# Altium PCB wificar.PcbDoc (part 3 of 3)
Units mil, origin at the board's own origin, x right, y up, seen from the top; angles counter-clockwise.
Board outline 3940.12 x 3943.17 mil, 2 copper layers (Top Layer, Bottom Layer); 89 components, 114 nets, 455 pads, 176 vias.
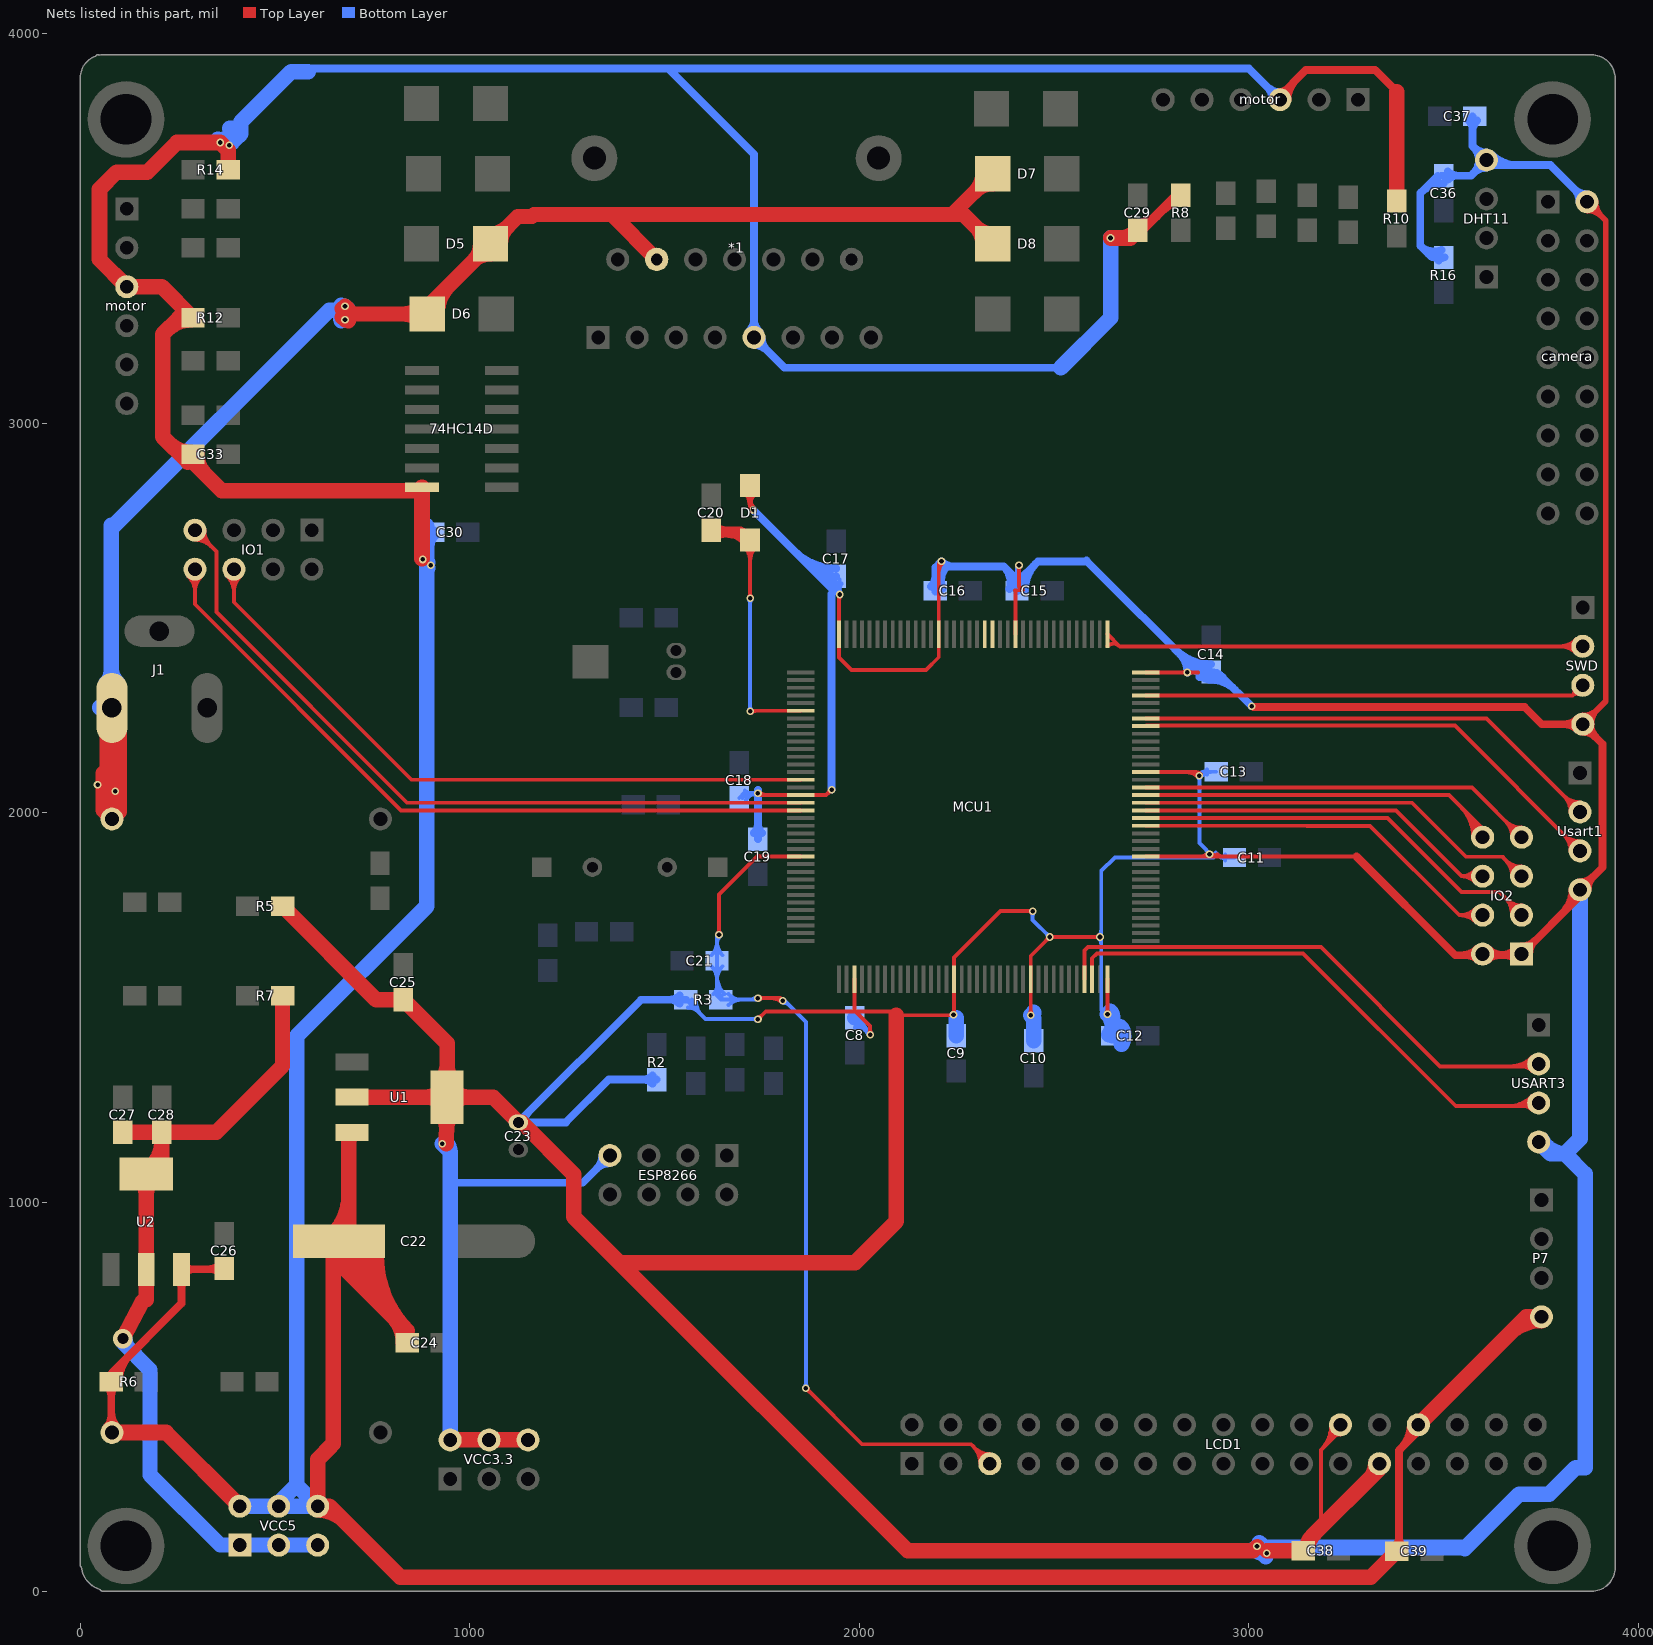
[diagram p3: the nets of this part, all layers, seen from the top]

## Via types
v1: diameter 19.68, hole 11.81, Top Layer to Bottom Layer, 175 vias
v2: diameter 50, hole 28, Top Layer to Bottom Layer, 1 vias

## Nets (pads, with @x,y where several pads share a name; then routed paths per layer and width w, separated by ;. In a path a pad name is that pad's centre, name@x,y a point inside that pad or via, vN(x,y) a via of type N, cw(c..) or ccw(c..) an arc to the next point about the centre after c; other vN are vias at no path point) (continued)
PF5: IO1.6 MCU1.15 | length 1876.5
  Top Layer w10: IO1.6@377.66,2607.66 cw(c335.79,2565.79) 395,2565.79 cw(c454.21,2565.79) IO1.6@412.34,2607.66 ; IO1.6@384.73,2614.73 cw(c359.93,2589.93) 395,2589.93 cw(c430.07,2589.93) IO1.6@405.27,2614.73 ; IO1.6@395,2625 395,2540 850.57,2084.43 MCU1.15@1849.65,2084.43
PF6: IO1.7 MCU1.18 | length 2083.3
  Top Layer w10: IO1.7@295,2700.47 cw(c295,2641.26) 336.87,2683.13 cw(c378.74,2725) IO1.7@319.53,2725 ; IO1.7@295,2710.47 cw(c295,2675.4) 319.8,2700.2 cw(c344.6,2725) IO1.7@309.53,2725 ; IO1.7@295,2725 350,2670 350,2515 839.62,2025.38 MCU1.18@1849.65,2025.38
PF7: IO1.8 MCU1.19 | length 2012
  Top Layer w10: IO1.8@277.66,2607.66 cw(c235.79,2565.79) 295,2565.79 cw(c354.21,2565.79) IO1.8@312.34,2607.66 ; IO1.8@284.73,2614.73 cw(c259.93,2589.93) 295,2589.93 cw(c330.07,2589.93) IO1.8@305.27,2614.73 ; IO1.8@295,2625 295,2535 824.31,2005.69 MCU1.19@1849.65,2005.69
PG3: IO2.4 MCU1.88 | length 1107.6
  Top Layer w10: MCU1.88@2735.47,1966.32 3148.32,1966.32 3148.65,1966 3311,1966 3540,1737 IO2.4@3600,1737 ; IO2.4@3582.66,1719.66 ccw(c3540.79,1677.79) 3540.79,1737 ccw(c3540.79,1796.21) IO2.4@3582.66,1754.34 ; IO2.4@3589.73,1726.73 ccw(c3564.93,1701.93) 3564.93,1737 ccw(c3564.93,1772.07) IO2.4@3589.73,1747.27
PG4: IO2.3 MCU1.89 | length 1217.5
  Top Layer w10: MCU1.89@2735.47,1986.01 3355.99,1986.01 3545.53,1796.47 3643.53,1796.47 3700,1740 IO2.3@3700,1737 ; 3656.01,1783.99 cw(c3609.02,1737) IO2.3@3675.47,1737 ; 3663.25,1776.75 ccw(c3700,1813.5) IO2.3@3700,1761.53 ; 3673.08,1766.92 cw(c3643.16,1737) IO2.3@3685.47,1737 ; 3680.32,1759.68 ccw(c3700,1779.36) IO2.3@3700,1751.53
PG5: IO2.6 MCU1.90 | length 1062.5
  Top Layer w10: MCU1.90@2735.47,2005.69 3377.31,2005.69 3546,1837 ; IO2.6@3581.53,1820.86 ccw(c3546,1789.82) 3546,1837 ; IO2.6@3581.53,1853.14 cw(c3546,1884.18) 3546,1837 ; IO2.6@3589.06,1827.44 ccw(c3568.02,1809.06) 3568.02,1837 ccw(c3568.02,1864.94) IO2.6@3589.06,1846.56 ; IO2.6@3600,1837 3546,1837
PG6: IO2.5 MCU1.91 | length 1191.8
  Top Layer w10: MCU1.91@2735.47,2025.38 3418.62,2025.38 3557,1887 3652,1887 3652,1885 IO2.5@3700,1837 ; IO2.5@3675.47,1837 ccw(c3616.26,1837) 3658.13,1878.87 ccw(c3700,1920.74) IO2.5@3700,1861.53 ; IO2.5@3685.47,1837 ccw(c3650.4,1837) 3675.2,1861.8 ccw(c3700,1886.6) IO2.5@3700,1851.53
PG7: IO2.8 MCU1.92 | length 1130
  Top Layer w10: MCU1.92@2735.47,2045.06 3513.94,2045.06 3600,1959 IO2.8@3600,1937 ; 3542.57,2016.43 cw(c3463.15,1937) IO2.8@3575.47,1937 ; 3559.64,1999.36 cw(c3497.29,1937) IO2.8@3585.47,1937 ; 3576.71,1982.29 cw(c3531.43,1937) IO2.8@3595.47,1937
PG8: IO2.7 MCU1.93 | length 1165.6
  Top Layer w10: MCU1.93@2735.47,2064.75 3572.25,2064.75 IO2.7@3700,1937 ; IO2.7@3675.47,1937 ccw(c3616.26,1937) 3658.13,1978.87 ccw(c3700,2020.74) IO2.7@3700,1961.53 ; IO2.7@3685.47,1937 ccw(c3650.4,1937) 3675.2,1961.8 ccw(c3700,1986.6) IO2.7@3700,1951.53
PG9: MCU1.124
PG10: MCU1.125
RESET: C21.2 LCD1.5 MCU1.25 R3.1 | length 2924.7
  Top Layer w10: v1@1636.58,1690.42 ccw(c1628.31,1698.69) 1640,1698.69 ccw(c1651.69,1698.69) v1@1643.42,1690.42 ; v1(1640,1687) 1640,1790 1740,1890 1742.42,1887.58 MCU1.25@1849.65,1887.58 ; v1(1740,1524) 1797,1524 ; v1@1743.42,1520.58 cw(c1751.69,1512.31) 1751.69,1524 cw(c1751.69,1535.69) v1@1743.42,1527.42 ; 1775.41,1524 cw(c1775.41,1488.41) v1@1800.58,1513.58 ; v1@1799.2,1517.6 ccw(c1791.56,1518.56) 1797,1524 ; v1@1803.4,1521.8 cw(c1802.44,1529.44) 1797,1524 ; v1(1804,1517) 1797,1524 ; v1@1863,518.16 cw(c1863,506.47) 1871.27,514.73 cw(c1879.53,523) v1@1867.84,523 ; v1(1863,523) 2007,379 2287,379 2335,331 LCD1.5@2335,329 ; 2291.71,374.29 cw(c2246.43,329) LCD1.5@2310.47,329 ; 2296.54,369.46 ccw(c2335,407.91) LCD1.5@2335,353.53 ; 2308.79,357.21 cw(c2280.57,329) LCD1.5@2320.47,329 ; 2313.61,352.39 ccw(c2335,373.77) LCD1.5@2335,343.53
  Bottom Layer w10: C21.2@1620.86,1605.79 cw(c1586.72,1571.65) 1635,1571.65 cw(c1683.28,1571.65) C21.2@1649.14,1605.79 ; C21.2@1620.86,1634.08 ccw(c1586.72,1668.22) 1635,1668.22 ccw(c1683.28,1668.22) C21.2@1649.14,1634.08 ; R3.1@1625.86,1534.21 ccw(c1603.79,1556.28) 1635,1556.28 ccw(c1676.21,1556.28) R3.1@1647.07,1527.14 ; 1635,1580.42 ccw(c1700.36,1580.42) R3.1@1654.14,1534.21 ; 1635,1663.24 cw(c1663.76,1663.24) v1@1643.42,1683.58 ; v1(1640,1687) 1635,1682 C21.2@1635,1619.94 1635,1530.06 R3.1@1645,1520.06 1736.06,1520.06 v1(1740,1524) ; R3.1@1664.14,1505.92 cw(c1698.28,1471.78) 1698.28,1520.06 cw(c1698.28,1568.35) R3.1@1664.14,1534.21 ; 1718.81,1520.06 ccw(c1718.81,1545.19) v1@1736.58,1527.42 ; v1@1804,1512.16 cw(c1804,1488.4) 1820.8,1505.2 ; v1@1807,1519 1863,1463 v1(1863,523) ; v1@1859.58,526.42 ccw(c1851.31,534.69) 1863,534.69 ccw(c1874.69,534.69) v1@1866.42,526.42
SWCLK: MCU1.109 SWD.2 | length 1415.7
  Top Layer w10: MCU1.109@2637.05,2428.02 cw(c2652.23,2410.73) 2668.5,2427 ; MCU1.109@2637.05,2458.45 2668.5,2427 ; SWD.2@3839.66,2409.66 ccw(c3797.79,2367.79) 3797.79,2427 ccw(c3797.79,2486.21) SWD.2@3839.66,2444.34 ; SWD.2@3846.73,2416.73 ccw(c3821.93,2391.93) 3821.93,2427 ccw(c3821.93,2462.07) SWD.2@3846.73,2437.27 ; SWD.2@3857,2427 2668.5,2427
SWDIO: MCU1.105 SWD.3 | length 1168.4
  Top Layer w10: MCU1.105@2735.47,2300.97 3830.97,2300.97 ; SWD.3@3834.32,2317.67 cw(c3820.11,2311.83) 3830.97,2300.97 ; SWD.3@3847.67,2304.32 ccw(c3841.83,2290.11) 3830.97,2300.97 ; SWD.3@3857,2327 3830.97,2300.97
USART1_RX: MCU1.102 Usart1.2 | length 1362
  Top Layer w10: MCU1.102@2735.47,2241.91 3610.09,2241.91 Usart1.2@3850,2002 ; Usart1.2@3825.47,2002 ccw(c3766.26,2002) 3808.13,2043.87 ccw(c3850,2085.74) Usart1.2@3850,2026.53 ; Usart1.2@3835.47,2002 ccw(c3800.4,2002) 3825.2,2026.8 ccw(c3850,2051.6) Usart1.2@3850,2016.53
USART1_TX: MCU1.101 Usart1.3 | length 1396.2
  Top Layer w10: MCU1.101@2735.47,2222.23 2736.63,2223.39 3528.61,2223.39 Usart1.3@3850,1902 ; Usart1.3@3825.47,1902 ccw(c3766.26,1902) 3808.13,1943.87 ccw(c3850,1985.74) Usart1.3@3850,1926.53 ; Usart1.3@3835.47,1902 ccw(c3800.4,1902) 3825.2,1926.8 ccw(c3850,1951.6) Usart1.3@3850,1916.53
USART3_RX: MCU1.70 USART3.3 | length 1550.7
  Top Layer w10: MCU1.70@2597.68,1572.62 2597.68,1626.32 2610.4,1639.05 3138.95,1639.05 3531,1247 USART3.3@3755,1247 ; 3665.47,1247 ccw(c3665.47,1333.53) USART3.3@3726.66,1272.34 ; 3689.61,1247 ccw(c3689.61,1309.39) USART3.3@3733.73,1265.27 ; 3704.1,1247 cw(c3704.1,1215.1) USART3.3@3726.66,1237.66 ; 3713.76,1247 ccw(c3713.76,1285.24) USART3.3@3740.8,1258.2
USART3_TX: MCU1.69 USART3.2 | length 1506.5
  Top Layer w10: MCU1.69@2577.99,1572.62 2577.99,1645.99 2587.05,1655.05 3184.95,1655.05 3491,1349 USART3.2@3744,1349 ; 3670.3,1349 ccw(c3670.3,1428.7) USART3.2@3726.66,1372.34 ; 3694.44,1349 ccw(c3694.44,1404.56) USART3.2@3733.73,1365.27 ; 3699.27,1349 cw(c3699.27,1310.27) USART3.2@3726.66,1337.66
VBAT: C20.2 D1.2 MCU1.6 | length 1065.6
  Top Layer w10: D1.2@1705.44,2681.5 cw(c1670.29,2646.35) 1720,2646.35 cw(c1769.71,2646.35) D1.2@1734.56,2681.5 ; v1@1716.58,2553.42 ccw(c1708.31,2561.69) 1720,2561.69 ccw(c1731.69,2561.69) v1@1723.42,2553.42 ; v1(1720,2260) 1721.6,2261.6 MCU1.6@1849.65,2261.6 ; v1(1720,2550) D1.2@1720,2700 ; v1@1723.42,2256.58 cw(c1735.55,2244.45) 1735.55,2261.6
  Top Layer w20: C20.2@1619.94,2725 1695,2725 D1.2@1720,2700 ; C20.2@1627.79,2707.22 cw(c1658.17,2657.78) 1673.19,2713.83 ; C20.2@1630.54,2714.39 cw(c1656.15,2688.79) 1656.15,2725 cw(c1656.15,2761.21) C20.2@1630.54,2735.61 ; C20.2@1631.51,2725 cw(c1631.51,2615.45) D1.2@1708.98,2692.91 ; 1679.79,2725 cw(c1679.79,2663.73) D1.2@1723.12,2707.05
  Bottom Layer w10: v1@1716.58,2263.42 ccw(c1708.31,2271.69) 1720,2271.69 ccw(c1731.69,2271.69) v1@1723.42,2263.42 ; v1@1716.58,2546.58 cw(c1708.31,2538.31) 1720,2538.31 cw(c1731.69,2538.31) v1@1723.42,2546.58 ; v1(1720,2260) v1(1720,2550)
VCC1.8: C27.1 C28.1 R7.1 U2.2 U2.4 VCC5.1 VCC5.3 VCC5.5 | length 2305.3
  Top Layer w39: v2(110,650) 160.43,746.98 170,750 U2.2@170,827.95 U2.4@170,1072.05 210.06,1112.11 C28.1@210.06,1180 ; C27.1@110.06,1180 C28.1@210.06,1180 ; U2.4@153.86,1055.91 cw(c114.9,1016.95) 170,1016.95 cw(c225.1,1016.95) U2.4@186.14,1055.91 ; U2.4@180.44,1088.19 ccw(c108.91,1159.71) C28.1@210.06,1159.71 ; R7.1@520,1530.06 520,1350 350,1180 C28.1@210.06,1180
  Bottom Layer w39: v2(110,650) 110,640 180,570 180,300 360,120 VCC5.1@410,120 VCC5.3@510,120 VCC5.5@610,120 ; v2@115.5,650 ccw(c152.92,650) 126.46,623.54
VCC3.3: C8.1 C9.1 C10.1 C11.1 C12.1 C13.1 C14.1 C15.1 C16.1 C17.1 C18.1 C19.1 C23.1 C25.1 C36.1 C37.1 C38.1 camera.2 D1.1 DHT11.4 ESP8266.7 IO2.1 IO2.2 LCD1.24 LCD1.25 MCU1.17 MCU1.39 MCU1.52 MCU1.62 MCU1.72 MCU1.84 MCU1.95 MCU1.108 MCU1.121 MCU1.131 MCU1.144 R2.2 R3.2 R5.1 R16.1 SWD.4 U1.2 U1.4 Usart1.4 USART3.4 VCC3.3.2 VCC3.3.4 VCC3.3.6 | length 27956.8
  Top Layer w10: D1.1@1705.44,2821.5 cw(c1670.29,2786.35) 1720,2786.35 cw(c1769.71,2786.35) D1.1@1734.56,2821.5 ; 1716.53,2799.29 ccw(c1745.33,2807.01) v1@1730.42,2781.19 ; 1717.62,2795.23 ccw(c1737.45,2800.54) v1@1729.8,2781.49 ; 1719.5,2784.49 ccw(c1729.34,2781.85) v1@1726.62,2772.03 ; 1720,2783.86 ccw(c1734.86,2783.86) v1@1724.35,2773.35 ; 1720,2808 ccw(c1759,2808) v1@1731.42,2780.42 ; D1.1@1720,2840 1720,2785 ; 1722.11,2794.23 ccw(c1732.04,2791.57) v1@1729.29,2781.67 ; v1@1723.16,2777.11 ccw(c1712.37,2777.37) 1720,2785 ; v1@1727.89,2781.84 cw(c1727.63,2792.63) 1720,2785 ; v1(1728,2777) 1720,2785 ; v1(1740,1470) 1760,1490 1990,1490 ; v1@1740,1474.84 ccw(c1740,1486.53) 1748.27,1478.27 ccw(c1756.53,1470) v1@1744.84,1470 ; v1(1740,2050) 1744.94,2045.06 MCU1.17@1849.65,2045.06 1915.06,2045.06 v1(1929,2059) ; v1@1743.42,2053.42 ccw(c1763.61,2073.61) 1763.61,2045.06 ; v1@1924.16,2059 cw(c1912.47,2059) 1920.73,2050.73 cw(c1929,2042.47) v1@1929,2054.16 ; 1948.07,2543.65 cw(c1966.35,2543.65) v1@1953.42,2556.58 ; v1(1950,2560) 1948.07,2558.07 MCU1.144@1948.07,2458.45 1948.07,2397.93 1980,2366 2171,2366 2203.98,2398.98 MCU1.131@2203.98,2458.45 2203.98,2637.98 ; MCU1.39@1987.44,1572.62 1987.44,1492.56 1990,1490 ; v1@2024.58,1433.42 ccw(c2016.31,1441.69) 2028,1441.69 ccw(c2039.69,1441.69) v1@2031.42,1433.42 ; v1(2028,1430) 2028,1452 1990,1490 ; 2085,1490 1990,1490 ; 2095,1480 2240,1480 2243.35,1483.35 MCU1.52@2243.35,1572.62 2243.35,1628.35 2363,1748 2444,1748 v1(2445,1747) ; 2203.98,2616.35 cw(c2239.65,2616.35) v1@2214.42,2641.58 ; v1@2206.19,2644.41 cw(c2198.48,2643.47) 2203.98,2637.98 ; v1@2210.41,2640.19 ccw(c2209.47,2632.48) 2203.98,2637.98 ; v1(2211,2645) 2203.98,2637.98 ; v1@2238.58,1484.42 ccw(c2227.06,1495.94) 2243.35,1495.94 ; MCU1.121@2400.83,2458.45 2400.83,2569.17 2400,2570 2401,2571 2420,2571 2410,2581 v1(2410,2635) ; v1@2406.58,2631.58 cw(c2398.31,2623.31) 2410,2623.31 cw(c2421.69,2623.31) v1@2413.42,2631.58 ; 2430.9,1748 cw(c2430.9,1732.89) v1@2441.58,1743.58 ; v1@2436.58,1483.42 ccw(c2427.84,1492.16) 2440.2,1492.16 ; v1(2440,1480) 2440.2,1480.2 MCU1.62@2440.2,1572.62 2440.2,1632.2 v1(2489,1681) v1(2618,1681) ; 2440.2,1491.22 ccw(c2451.22,1491.22) v1@2443.42,1483.42 ; v1@2484.16,1681 cw(c2472.47,1681) 2480.73,1672.73 cw(c2489,1664.47) v1@2489,1676.16 ; v1@2492.42,1677.58 cw(c2500.69,1669.31) 2500.69,1681 cw(c2500.69,1692.69) v1@2492.42,1684.42 ; v1@2614.58,1677.58 ccw(c2606.31,1669.31) 2606.31,1681 ccw(c2606.31,1692.69) v1@2614.58,1684.42 ; v1@2633.62,1486.38 ccw(c2625.36,1494.64) 2637.05,1494.64 ccw(c2648.74,1494.64) v1@2640.47,1486.38 ; v1(2637.05,1482.95) MCU1.72@2637.05,1572.62 ; MCU1.84@2735.47,1887.58 3276.42,1887.58 ; MCU1.95@2735.47,2104.12 2863.88,2104.12 v1(2873,2095) ; MCU1.108@2735.47,2360.02 2869.98,2360.02 v1(2842,2360) ; 2830.25,2360.02 cw(c2830.25,2348.25) v1@2838.58,2356.58 ; 2830.37,2360.02 ccw(c2830.37,2371.63) v1@2838.58,2363.42 ; 2839.29,2104.12 cw(c2839.29,2061.29) v1@2869.58,2091.58 ; 2853.63,2360.02 cw(c2853.63,2371.63) 2845.42,2363.42 ccw(c2853.69,2371.69) 2853.69,2360 ccw(c2853.69,2348.31) 2845.42,2356.58 cw(c2853.75,2348.25) 2853.75,2360.02 ; 2863.43,2104.12 cw(c2863.43,2085.43) v1@2876.65,2098.65 ; v1@2868.16,2095 ccw(c2856.47,2095) 2864.73,2103.27 ccw(c2873,2111.53) v1@2873,2099.84 ; 2874.23,1887.58 ccw(c2874.23,1917.77) v1@2895.58,1896.42 ; v1@2902.42,1896.42 ccw(c2923.77,1917.77) 2923.77,1887.58 ; 2918.42,1893.42 ccw(c2932.52,1907.52) 2932.52,1887.58 ; v1(3007,2273) 3010,2273 v1@3012,2271 ; C38.1@3140,105.94 3163.53,129.47 3163.53,144.53 cw(c3144.94,144.53) C38.1@3144.97,125.94 ; C38.1@3145,105.94 ccw(c3144.97,124.5) C38.1@3163.53,124.5 ; C38.1@3144.98,115.94 ccw(c3144.95,134.51) 3163.53,134.51 ; 3185,175 3185,364 ; 3201.37,380.37 ccw(c3155.16,426.58) LCD1.24@3220.48,428.56 ; LCD1.24@3210.48,428.26 cw(c3123.39,425.62) 3185,364 ; 3217.73,396.73 ccw(c3186.92,427.54) LCD1.24@3230.47,428.86 ; 3218.74,397.74 cw(c3235,381.47) LCD1.24@3235,404.47 ; LCD1.24@3235,429 3235,414 3185,364 ; LCD1.25@3335,316 LCD1.25@3335,329 ; IO2.1@3697,1634 IO2.1@3700,1637 ; Usart1.4@3850,1787 Usart1.4@3850,1802
  Top Layer w15: SWD.4@3857,2227 3916,2286 3916,3520 camera.2@3868,3568 ; SWD.4@3857,2249.03 ccw(c3857,2302.21) 3894.6,2264.6 ccw(c3932.21,2227) SWD.4@3879.03,2227 ; camera.2@3868,3545.97 cw(c3868,3492.79) 3905.6,3530.4 cw(c3943.21,3568) camera.2@3890.03,3568
  Top Layer w20: v1@3012,2271 3708,2271 3752,2227 SWD.4@3857,2227 3908,2176 3908,1860 Usart1.4@3850,1802 ; 3276.42,1887.58 3530,1634 IO2.1@3697,1634 ; 3545.61,1634 ccw(c3545.61,1691.39) IO2.2@3586.19,1650.81 ; 3560.1,1634 cw(c3560.1,1597.1) IO2.2@3586.19,1623.19 ; IO2.2@3613.81,1623.19 cw(c3639.9,1597.1) 3639.9,1634 ; IO2.2@3613.81,1650.81 ccw(c3654.39,1691.39) 3654.39,1634 ; 3645.61,1634 ccw(c3645.61,1691.39) IO2.1@3686.19,1650.81 ; 3660.1,1634 cw(c3660.1,1597.1) IO2.1@3686.19,1623.19 ; IO2.1@3700,1637 Usart1.4@3850,1787 ; IO2.1@3700,1656.53 ccw(c3700,1703.67) 3733.34,1670.34 ccw(c3766.67,1637) IO2.1@3719.53,1637 ; 3806.06,1743.06 ccw(c3747.12,1802) Usart1.4@3830.47,1802 ; SWD.4@3843.19,2213.19 ccw(c3809.86,2179.86) 3809.86,2227 ccw(c3809.86,2274.14) SWD.4@3843.19,2240.81 ; Usart1.4@3850,1821.53 ccw(c3850,1868.67) 3883.34,1835.34 ccw(c3916.67,1802) Usart1.4@3869.53,1802 ; SWD.4@3857,2207.47 cw(c3857,2160.33) 3890.34,2193.66 cw(c3923.67,2227) SWD.4@3876.53,2227
  Top Layer w40: R5.1@520,1760.06 760.06,1520 C25.1@830.06,1520 942.05,1408.02 U1.4@942.05,1270 ; U1.2@697.95,1270 U1.4@942.05,1270 ; U1.4@926.02,1227.89 cw(c888.34,1191.38) 940.8,1190.56 ; U1.4@926.26,1254.22 ccw(c888.16,1216.11) 888.16,1270 ccw(c888.16,1323.89) U1.4@926.26,1285.78 ; U1.4@926.26,1312.36 ccw(c888.16,1350.47) 942.05,1350.47 ccw(c995.94,1350.47) U1.4@957.83,1312.36 ; 940.16,1149.84 U1.4@942.05,1270 ; 940.76,1188.54 cw(c996.08,1187.66) U1.4@957.58,1227.39 ; VCC3.3.2@950,390 VCC3.3.4@1050,390 VCC3.3.6@1150,390 ; U1.4@957.83,1254.22 cw(c995.94,1216.11) 995.94,1270 cw(c995.94,1323.89) U1.4@957.83,1285.78 ; 2095,1480 2095,951 1989,845 1385,845 ; v1@3021,115.94 3011,105.94 2124.06,105.94 1385,845 ; v1@3046,105.94 C38.1@3140,105.94 ; C38.1@3149.97,106.44 cw(c3196.84,111.22) 3163.53,144.53 LCD1.25@3335,316 ; C38.1@3150,105.94 cw(c3210.51,105.94) 3167.72,148.72 ; 3309.54,290.54 ccw(c3271.09,329) LCD1.25@3325.47,329 ; U1.4@942.05,1270 1060,1270 C23.1@1125,1205 1134,1205 1267,1072 1267,963 1385,845
  Bottom Layer w10: R3.2@1555,1520.06 1605.06,1470 v1(1740,1470) ; R3.2@1560,1500.06 cw(c1560,1463.85) 1585.61,1489.46 ; R3.2@1570,1520.06 ccw(c1606.21,1520.06) 1580.61,1494.46 ; R3.2@1580,1520.06 ccw(c1640.36,1520.06) 1597.68,1477.39 ; C18.1@1692.06,2038 1704.06,2050 v1(1740,2050) ccw(c1740,2013.95) C18.1@1709.17,2032.63 ; C18.1@1700.62,2037.82 cw(c1722.24,2024.71) 1722.24,2050 ; C18.1@1706.21,2057.14 ccw(c1723.45,2074.38) 1723.45,2050 ; v1@1735.81,2052.42 cw(c1725.68,2058.27) 1728.71,2046.97 cw(c1731.73,2035.68) v1@1737.58,2045.81 ; v1@1736.58,1466.58 ccw(c1728.31,1458.31) 1728.31,1470 ccw(c1728.31,1481.69) v1@1736.58,1473.42 ; v1@1736.58,2046.58 ccw(c1728.31,2038.31) 1728.31,2050 ccw(c1728.31,2061.69) v1@1736.58,2053.42 ; 1929,2560.94 1936.53,2568.47 1938.06,2570 ; C17.1@1933.56,2583.46 cw(c1923.67,2559.06) v1@1950,2559.06 ; C17.1@1937.31,2592.73 cw(c1929.68,2573.9) 1950,2573.9 ; C17.1@1941.06,2607 1950,2598.06 v1(1950,2560) ; v1@1945.81,2562.42 ccw(c1936.4,2567.85) 1946.89,2570.66 ; v1@1946.58,2563.42 ccw(c1938.31,2571.69) 1950,2571.69 ccw(c1961.69,2571.69) v1@1953.42,2563.42 ; 1946.59,2571.8 ccw(c1958.68,2575.04) v1@1952.42,2564.19 ; 1950,2575.29 cw(c1967.77,2575.29) C17.1@1955.21,2587.86 ; C8.1@1988.43,1459.01 cw(c1990.15,1424.05) 2014.9,1448.8 ; C8.1@1988.92,1449.02 cw(c1991.65,1393.65) 2030.85,1432.85 C8.1@1989.71,1474 ; C8.1@2007.94,1469 ccw(c2039.88,1469) 2017.29,1446.41 ; 2011.68,1443.93 cw(c1999.18,1422.28) v1@2023.32,1428.75 ; 2015.7,1448.01 cw(c1997.69,1430) v1@2023.16,1430 ; C15.1@2390.86,2584.08 ccw(c2356.72,2618.22) 2405,2618.22 ccw(c2453.28,2618.22) C15.1@2419.14,2584.08 ; C15.1@2405,2569.94 2405,2591 2405,2598 ; 2405,2611.24 cw(c2433.76,2611.24) v1@2413.42,2631.58 ; v1(2410,2635) 2405,2630 2405,2598 ; v1@2441.58,1743.58 cw(c2433.31,1735.31) 2445,1735.31 cw(c2456.69,1735.31) v1@2448.42,1743.58 ; v1(2445,1747) 2445,1725 v1(2489,1681) ; v1@2484.16,1681 ccw(c2472.47,1681) 2480.73,1689.27 ccw(c2489,1697.53) v1@2489,1685.84 ; 2583,2645 2583,2647 ; v1@2614.58,1677.58 cw(c2599.07,1662.07) 2621,1662.07 ; v1@2614.58,1684.42 ccw(c2599.07,1699.93) 2621,1699.93 ; v1(2618,1681) v1@2621,1681 ; 2621,1493.94 v1@2621,1681 ; v1@2634.51,1480.42 2645,1469.94 cw(c2653.78,1478.72) v1@2641.74,1481.77 ; 2867.84,1884.94 ccw(c2867.84,1924.16) v1@2895.58,1896.42 ; v1@2869.35,2098.65 cw(c2884.54,2083.46) 2884.54,2104.94 ; v1@2869.58,2091.58 cw(c2861.31,2083.31) 2873,2083.31 cw(c2884.69,2083.31) 2876.42,2091.58 cw(c2908.68,2059.32) C13.1@2908.68,2104.94 ; 2870,2360 2873,2357 2873,2348 ; v1@2873,2099.84 ccw(c2873,2111.53) 2881.27,2103.27 ccw(c2889.53,2095) v1@2877.84,2095 ; 2888.66,1906.28 cw(c2875.38,1893) v1@2894.16,1893 ; 2891.98,1884.94 ccw(c2891.98,1900.02) v1@2902.65,1889.35 ; C13.1@2892.09,2098.41 ccw(c2882.94,2095.25) 2882.94,2104.94 ; C13.1@2892.09,2111.46 cw(c2882.94,2114.62) 2882.94,2104.94 ; v1(2899,1893) 2912,1893 2915,1890 2915,1898 2928.06,1884.94 ; v1@2899.8,1888.22 cw(c2901.72,1876.72) 2909.97,1884.97 2873,1921.94 v1(2873,2095) 2882.94,2104.94 ; v1@2902.42,1889.58 cw(c2910.69,1881.31) 2910.69,1893 cw(c2910.69,1904.69) v1@2902.42,1896.42 ; 2910,1884.94 2655.94,1884.94 2621,1850 v1@2621,1681 ; C13.1@2916,2104.94 2882.94,2104.94 ; C11.1@2939.52,1877.28 ccw(c2928.07,1872.53) 2928.07,1884.94 ; C11.1@2939.52,1892.59 cw(c2928.07,1897.34) 2928.07,1884.94 ; C11.1@2963,1884.94 2928.06,1884.94 ; C36.1@3485,3635 C36.1@3499.94,3635 ; R16.1@3489,3427 3491,3425 R16.1@3499.94,3425 ; DHT11.4@3610,3675 DHT11.4@3623,3662 ; 2405,2598 cw(c2395.31,2598) 2398.47,2588.84 ccw(c2395.31,2598) 2405,2598 ; 2405,2598 ccw(c2414.69,2598) 2411.53,2588.84 cw(c2414.69,2598) 2405,2598
  Bottom Layer w20: 950,1050 1290,1050 ESP8266.7@1360,1120 ; C23.1@1137.07,1197.93 cw(c1154.14,1180.86) 1154.14,1205 cw(c1154.14,1229.14) C23.1@1137.07,1212.07 ; C23.1@1140,1205 cw(c1176.21,1205) 1150.61,1230.61 ; VCC3.3.6@1150,390 VCC3.3.6@1160,390 ; ESP8266.7@1340.47,1120 cw(c1293.33,1120) 1326.66,1086.66 cw(c1360,1053.33) ESP8266.7@1360,1100.47 ; R2.2@1469.33,1304.39 ccw(c1443.72,1278.79) 1443.72,1315 ccw(c1443.72,1351.21) R2.2@1469.33,1325.61 ; R2.2@1479.94,1315 1357,1315 1247,1205 C23.1@1125,1205 1440.06,1520.06 R3.2@1555,1520.06 ; R3.2@1539.39,1509.46 ccw(c1513.79,1483.85) 1513.79,1520.06 ccw(c1513.79,1556.28) R3.2@1539.39,1530.67 ; v1(1728,2777) 1936.53,2568.47 ; C19.1@1729.33,1947.56 ccw(c1703.41,1973.48) 1740.06,1973.48 ; C19.1@1740.06,1932.08 v1@1740.06,2058 ; 1740.06,1972.86 ccw(c1775.84,1972.86) C19.1@1750.54,1947.56 ; 1833.41,2671.59 ccw(c1941.06,2779.25) C17.1@1941.06,2627 ; 1867.55,2637.45 ccw(c1941.06,2710.97) C17.1@1941.06,2607 ; 1901.69,2603.31 ccw(c1941.06,2642.68) C17.1@1941.06,2587 ; v1(1929,2059) 1929,2560.94 ; C16.1@2184.39,2580.54 ccw(c2158.79,2606.15) 2195,2606.15 ccw(c2231.21,2606.15) C16.1@2205.61,2580.54 ; C16.1@2195,2569.94 2195,2602 ; C16.1@2195.38,2568.01 cw(c2231.64,2583.1) 2203.87,2610.87 ; v1@2210.84,2644.99 ccw(c2225,2646.21) 2225,2632 ; v1@2210.89,2644.89 ccw(c2242,2676) 2242,2632 ; v1(2211,2645) 2195,2629 2195,2602 ; v1@2211.16,2645.01 cw(c2155.7,2641.3) 2195,2602 ; C16.1@2213.85,2575.7 cw(c2261.48,2595.52) 2225,2632 ; C15.1@2385.62,2574.22 ccw(c2329.85,2590.84) 2371,2632 ; 2394.73,2608.27 cw(c2366.4,2579.95) C15.1@2404.79,2568.51 ; C15.1@2405,2569.94 cw(c2455.85,2569.94) 2419.89,2605.89 ; C15.1@2405,2591 2459,2645 2583,2645 ; 2405,2598 2371,2632 ; C15.1@2425,2569.94 cw(c2524.14,2569.94) 2454.04,2640.04 ; 2583,2647 2870,2360 ccw(c2855.89,2345.89) v1@2841.89,2360.11 ; 2810.77,2419.23 ccw(c2903.06,2511.52) C14.1@2903.06,2381 ; 2822.47,2407.53 cw(c2774.94,2360) v1@2842.16,2360 ; 2844.91,2385.09 ccw(c2903.06,2443.24) C14.1@2903.06,2361 cw(c2903.06,2322.53) 2930.27,2349.73 ; C14.1@2879.06,2350.94 ccw(c2903.06,2374.95) 2903.06,2341 cw(c2903.06,2254.24) 2964.41,2315.59 ; C14.1@2888.59,2359.92 cw(c2873,2364.15) 2873,2348 2932,2348 ; C14.1@2917.68,2359.38 ccw(c2932,2362.7) 2932,2348 ; v1(3007,2273) 2932,2348 ; 3440.3,3590.3 cw(c3499.94,3530.66) C36.1@3499.94,3615 ; 3461.39,3433.61 ccw(c3487.83,3460.05) R16.1@3501.8,3425.36 ; 3468.55,3427 ccw(c3468.55,3456.38) R16.1@3489.33,3435.61 ; 3474.44,3624.44 cw(c3499.94,3598.94) C36.1@3499.94,3635 3570,3635 DHT11.4@3610,3675 3574,3711 C37.1@3574,3787.06 ; C36.1@3485,3635 3440,3590 3440,3455 ; R16.1@3487.49,3416.62 ccw(c3468,3403.51) 3468,3427 ; R16.1@3489,3427 3468,3427 ; R16.1@3494.33,3443.91 cw(c3475.55,3490.55) 3440,3455 ; C36.1@3510.54,3624.39 cw(c3536.15,3598.79) 3536.15,3635 cw(c3536.15,3671.21) C36.1@3510.54,3645.61 ; C37.1@3564.39,3776.46 cw(c3541.2,3753.27) 3574,3753.27 ; 3574,3748.44 cw(c3613.63,3748.44) C37.1@3585.61,3776.46 ; DHT11.4@3609.67,3674.67 ccw(c3640.24,3705.24) 3640.24,3662 ; DHT11.4@3610,3655.47 ccw(c3610,3608.33) 3576.66,3641.66 ccw(c3543.33,3675) 3590.47,3675 ccw(c3543.33,3675) 3576.66,3708.34 ccw(c3610,3741.67) DHT11.4@3610,3694.53 ; DHT11.4@3623,3662 3774,3662 camera.2@3868,3568 ; DHT11.4@3623.81,3688.81 ccw(c3688.53,3753.53) 3688.53,3662 ; camera.2@3848.47,3568 ccw(c3801.33,3568) 3834.66,3601.34 ccw(c3868,3634.67) camera.2@3868,3587.53 ; 2195,2602 cw(c2168.23,2602) 2185.39,2581.45 ccw(c2168.23,2602) 2195,2602 ; 2195,2602 ccw(c2221.77,2602) 2204.61,2581.45 cw(c2221.77,2602) 2195,2602 ; 2195,2602 2225,2632 ; 2225,2632 2371,2632 ; 3440,3455 3468,3427
  Bottom Layer w40: v1(930,1150) 950,1130 950,1050 VCC3.3.2@950,390 ; C8.1@1987.94,1474 C8.1@1989.71,1474 ; C9.1@2248.94,1427 v1@2248.94,1474.06 ; v1(2440,1480) 2447.94,1472.06 C10.1@2447.94,1415 ; 2447.18,1487.18 cw(c2445.36,1485.36) v1@2447.94,1485.36 ; C12.1@2640.98,1429.91 ccw(c2608.24,1454.15) v1(2637.05,1482.95) 2650,1470 C12.1@2650,1426.94 ; C12.1@2669.86,1450.14 cw(c2645.96,1426.23) C12.1@2673.13,1406.11 ; 3013.56,110.08 ccw(c3039,133.73) v1@3039,99 ; 3013.82,109.82 ccw(c3039.93,135.93) v1@3039.93,99 ; v1(3021,117) v1@3039,99 ; 3026.66,125.44 cw(c3006.11,94.8) v1@3043,94.8 ; 3027.8,124.54 cw(c2996.99,90.37) v1@3043,90.37 ; 3038.82,106.18 cw(c3057.69,87.31) 3057.69,114 ; USART3.4@3744,1155 3774.5,1124.5 3811.5,1124.5 ; USART3.4@3752.36,1159.57 ccw(c3811.5,1191.9) 3811.5,1124.5 ; Usart1.4@3850,1802 3850,1163 3811.5,1124.5 ; v1@3039,99 v1(3046,99) 3043,102 3043,114 3551,114 3554,111 3694,251 3771,251 3839,319 3863,319 3863,1073 3811.5,1124.5 ; 937.18,1157.18 cw(c906.24,1126.24) 950,1126.24 ccw(c906.24,1126.24) 937.18,1157.18 ; 2644.23,1490.14 cw(c2630.29,1476.2) 2650,1476.2 ccw(c2630.29,1476.2) 2644.23,1490.14
  other v1: 2242,1481
VCC5: 74HC14D.14 *1.9 C22.1 C24.1 C26.1 C29.1 C30.1 C33.1 C39.1 LCD1.28 motor.3 P7.4 pad.2 R6.1 R8.2 R10.2 R12.2 R14.1 U1.3 U2.3 VCC5.2 VCC5.4 VCC5.6 | length 19325.2
  Top Layer w20: pad.2@68.16,422.86 ccw(c39.58,451.45) 80,451.45 ; R6.1@69.39,529.33 cw(c43.79,503.72) 80,503.72 cw(c116.21,503.72) R6.1@90.61,529.33 ; 80,460.95 ccw(c133.86,460.95) pad.2@95.78,422.86 ; pad.2@81.97,409.06 80,411.02 R6.1@80,539.94 cw(c128.44,539.94) 94.19,574.19 ; R6.1@81.97,539.94 81.97,561.97 260.55,740.55 U2.3@260.55,827.95 368.02,827.95 C26.1@370.06,830 ; R6.1@100,539.94 cw(c196.72,539.94) 128.33,608.33 ; U2.3@252.31,799.04 cw(c232.42,779.15) 260.55,779.15 cw(c288.69,779.15) U2.3@268.79,799.04 ; U2.3@268.79,819.71 cw(c288.69,799.82) 288.69,827.95 cw(c288.69,856.09) U2.3@268.79,836.19 ; R12.2@273.22,3260.78 ccw(c254.07,3245.67) 254.07,3270.06 ; R12.2@273.22,3279.35 cw(c254.07,3294.46) 254.07,3270.06 ; C33.1@277,2900 C33.1@290,2900 ; C33.1@290,2910 C33.1@290,2919.94 ; R12.2@290,3270.06 254.06,3270.06 ; 328.91,827.95 ccw(c328.91,871.16) C26.1@359.46,840.61 ; 338.8,827.95 cw(c338.8,798.73) C26.1@359.46,819.39 ; C22.1@650,872.5 650,885 C22.1@665,900 C22.1@690,925 ; U1.3@690,1171.5 U1.3@697.95,1179.45 ; C24.1@830.98,651.92 ccw(c817.38,670) 840,670 ; C24.1@840,639.94 840,670 ; C24.1@849.02,651.92 cw(c862.62,670) 840,670 ; v1@877.64,2652.36 v1(880,2650) ; C29.1@2695.06,3475 C29.1@2715.06,3495 C29.1@2726,3495 ; R8.2@2816,3585 R8.2@2825.06,3585 ; motor.3@3075,3835 3146,3906 3324,3906 3380.06,3849.94 ; motor.3@3080,3849.53 ccw(c3080,3872.53) 3096.26,3856.26 ; motor.3@3099.53,3830 cw(c3170.81,3830) 3120.41,3880.41 ; C39.1@3374.39,115.54 ccw(c3348.79,141.15) 3385,141.15 ccw(c3421.21,141.15) C39.1@3395.61,115.54 ; C39.1@3385,109.94 3385,363 3435,413 LCD1.28@3435,429 ; 3390.35,368.35 ccw(c3329.7,429) LCD1.28@3415.47,429
  Top Layer w25: C29.1@2715.06,3512.5 ccw(c2715.06,3581.15) 2763.61,3532.61 ; C29.1@2726,3495 R8.2@2816,3585 ; 2779.72,3548.72 cw(c2825.06,3503.37) R8.2@2825.06,3567.5
  Top Layer w40: pad.2@81.97,409.06 220.94,409.06 VCC5.2@410,220 ; 223.65,3239.65 cw(c285,3178.31) R12.2@285,3265.06 ; 228.77,2948.23 ccw(c285,3004.45) C33.1@285,2924.94 ; 254.06,3270.06 212,3228 212,2965 C33.1@277,2900 ; C33.1@290,2900 364,2826 868.64,2826 74HC14D.14@877.64,2835 v1@877.64,2652.36 ; R12.2@290,3270.06 210.13,3349.94 motor.3@120,3349.94 50,3419.94 50,3600 94,3644 173,3644 249,3720 v1(360,3720) 380,3700 R14.1@380,3650 ; C33.1@300,2919.94 ccw(c372.27,2919.94) 321.17,2868.83 ; VCC5.6@610,210.47 cw(c610,115.04) 677.48,182.52 ; C22.1@643.93,912.59 ccw(c727.36,901.63) 667.86,842.14 ; 645,375 610,340 VCC5.6@610,220 640,220 822,38 3313.06,38 C39.1@3380,104.94 C39.1@3385,109.94 ; C22.1@648.52,916.48 ccw(c548.38,1016.62) 690,1016.62 ; 650,380 650,860 840,670 cw(c1031.66,861.67) C22.1@762.91,896.97 ; 650,807.52 cw(c757.48,807.52) C22.1@681.48,883.52 ; C22.1@683.59,907.38 ccw(c828.79,888.31) 725.24,784.76 ; C22.1@690,925 U1.3@690,1171.5 ; 690,1156.26 cw(c721.14,1156.26) U1.3@699.12,1178.28 ; C22.1@723.25,902.17 ccw(c930.22,874.99) 782.62,727.38 ; 801.67,708.33 cw(c733.28,639.94) C24.1@830,639.94 ; v1(2645,3475) C29.1@2695.06,3475 ; 2666.78,3475 ccw(c2666.78,3538.28) C29.1@2711.53,3493.54 ; R10.2@3380.06,3570 3380.06,3849.94 ; LCD1.28@3435,429 3712,706 P7.4@3751,706 ; 3668.16,662.16 cw(c3751,579.32) P7.4@3751,696.47
  Bottom Layer w20: 586,3902 594,3910 1510,3910 ; *1.9@1716.19,3233.81 ccw(c1682.86,3267.14) 1730,3267.14 ccw(c1777.14,3267.14) *1.9@1743.81,3233.81 ; *1.9@1730,3200.47 cw(c1730,3153.33) 1763.34,3186.66 cw(c1796.67,3220) *1.9@1749.53,3220 ; 2517,3142 1808,3142 *1.9@1730,3220 1730,3690 1510,3910 ; motor.3@3060.47,3830 ccw(c3013.33,3830) 3046.66,3863.34 ccw(c3080,3896.67) motor.3@3080,3849.53 ; motor.3@3080,3830 3000,3910 1510,3910
  Bottom Layer w40: 352.82,3727.18 cw(c354.79,3725.21) v1@354.79,3728 ; 368,3728 398,3728 412.5,3742.5 ; 371.31,3728 cw(c371.31,3701.31) 390.18,3720.18 ; 375.82,3720.18 cw(c394.69,3701.31) 394.69,3728 ; 384,3756 399,3756 412.5,3742.5 ; VCC5.2@410,220 VCC5.4@510,220 VCC5.6@610,220 556,274 ; VCC5.4@510,228 556,274 ; VCC5.4@519.53,220 cw(c561.84,220) 531.92,249.92 ; 586,3902 542,3902 412.5,3772.5 412.5,3742.5 ; 880,2745.06 890,2735.06 890,2650 ; 887.18,2642.82 ccw(c880.38,2649.62) 890,2649.62 ; 890,2635 890,1760 556,1426 556,274 ; 890,2683.72 cw(c936.21,2683.72) C30.1@903.54,2716.4 ; 2517,3142 2645,3270 v1(2645,3475) ; 887.18,2657.18 cw(c880.38,2650.38) 890,2650.38 ; 887.18,2657.18 cw(c880.38,2650.38) 890,2650.38 ; 887.18,2657.18 cw(c880.38,2650.38) 890,2650.38 ; 890,2634.62 ccw(c899.62,2634.62) 892.82,2627.82 cw(c899.62,2634.62) 890,2634.62 ; 890,2635.38 cw(c899.62,2635.38) 892.82,2642.18 ccw(c899.62,2635.38) 890,2635.38
  other v1: 900,2635 383,3713
VCC_BT: *1.4 D5.2 D6.2 D7.2 D8.2 J1.1 pad.0@81.97,1983.86 | length 5259.3
  Top Layer w39: v1@672.12,3294.42 ccw(c700,3314.16) 700,3280 ; v1@673.17,3293.17 ccw(c704.97,3324.97) 704.97,3280 ; v1(680,3265) 680,3280 ; v1@689.2,3262.06 ccw(c653.49,3273.49) v1(680,3300) 700,3280 ; D6.2@873.19,3261.77 ccw(c829.19,3217.77) 829.19,3280 ccw(c829.19,3342.23) D6.2@873.19,3298.23 ; D6.2@917.19,3280 cw(c1022.48,3280) 948.03,3354.45 ; D5.2@1027.81,3460 cw(c965.58,3460) 1009.58,3416 cw(c1053.58,3372) D5.2@1053.58,3434.22 ; D5.2@1053.58,3485.78 ccw(c1053.58,3548) 1097.58,3504 ccw(c1141.59,3460) D5.2@1079.36,3460 ; *1.4@1480,3420 1365,3535 ; D8.2@2317.06,3460 ccw(c2254.83,3460) 2298.83,3504 ccw(c2342.84,3548) D8.2@2342.84,3485.78 ; D7.2@2317.06,3640 cw(c2254.83,3640) 2298.83,3596 cw(c2342.84,3552) D7.2@2342.84,3614.22 ; D8.2@2342.84,3460 2267.84,3535 2240,3535 ; D7.2@2342.84,3640 2240,3537.16 2240,3535 ; 700,3280 D6.2@891.42,3280 891.42,3297.84 D5.2@1053.58,3460 1123.58,3530 1160,3530 1165,3535 1365,3535 ; 1365,3535 2240,3535 ; v1@673.17,3271.83 cw(c692.9,3252.1) 692.9,3280 ccw(c692.9,3252.1) v1@673.17,3271.83
  Top Layer w40: 60,2059.89 ccw(c158,2059.89) pad.0@88.7,1990.59 ; J1.1@67.76,2204.86 cw(c-10.06,2127.03) 100,2127.03 ; 70,2141.97 cw(c158.93,2141.97) J1.1@96.05,2204.86 ; J1.1@70,2267 70,2111.09 60,2101.09 60,2005.83 pad.0@81.97,1983.86 100,2001.89 J1.1@100,2220.91 ; pad.0@75.23,1990.59 ccw(c15.43,2050.39) 100,2050.39
  Bottom Layer w40: J1.1@50.91,2270 80,2299.09 80,2738 84,2734 640,3290 670,3290 v1(680,3300) ccw(c707.18,3272.82) 670.24,3262.19 ; J1.1@67.76,2333.14 ccw(c38.22,2362.68) 80,2362.68 ; 80,2371.89 ccw(c134.79,2371.89) J1.1@96.05,2333.14 ; 644.17,3290 cw(c644.17,3229.17) 687.18,3272.18 ; 670,3275 v1(680,3265) cw(c707.18,3292.18) 670.24,3302.81 ; 680.38,3290 ccw(c680.38,3299.62) 687.18,3292.82 cw(c680.38,3299.62) 680.38,3290
  other v1: 90,2055 45,2072
pads on no net: 74HC14D.10 74HC14D.12 *1.0 ESP8266.4 ESP8266.6 LCD1.32 MCU1.5 MCU1.7 MCU1.40 MCU1.41 MCU1.42 MCU1.43 MCU1.49 MCU1.50 MCU1.53 MCU1.54 MCU1.55 MCU1.73 MCU1.80 MCU1.81 MCU1.82 MCU1.98 MCU1.104 MCU1.106 MCU1.110 MCU1.113 MCU1.123 MCU1.137 MCU1.139 MCU1.140 MCU1.141 MCU1.142 Y1. Y2.

## Polygon pours and split planes (outlines as drawn)
no net on Top Layer "Bottom Layer-No Net" (solid, remove dead copper, shelved, pour order 4): -327,4102 -176,3951 4301,3951 4097,3747 4097,-153 -292,-153 -327,-118
GND on Bottom Layer "Bottom Layer-No Net" (solid, remove dead copper, pour order 5): -340,4408 -269,4479 5045,4479 5045,-220 4688,-577 4616,-505 -425,-505
GND on Top Layer "Bottom Layer-No Net" (solid, remove dead copper, pour order 7): -311,4251 -297,4237 4402,4237 4402,-320 4231,-491 4188,-448 -525,-448

## Keep-outs
Keep-Out Layer:
  lines w10: 4.98,69 4.98,3884.06 ; 5.39,3885.36 cw(c60.46,3885.36) 53.71,3940.01 ; 8,76 ccw(c71.42,71.78) 71.42,8.21 ; 43.31,3939.72 cw(c45,3935) 45,3940.02 46.4,3940.02 cw(c50.06,3885.06) 53.71,3940.02 ; 57,7 3875.12,7 ccw(c3879.94,61.86) 3935.01,61.86 3935.02,3882 ccw(c3930,3882) 3935.01,3882.27 ; 53.71,3940.02 3880,3940.02 cw(c3880,3884.94) 3935.07,3884.94 cw(c3880,3884.94) 3935.01,3882.27 ; 3935.01,3882.27 3935.01,3882.27

## Silkscreen, mask and mechanical layers (free items; w line width, h text height)
Top Overlay:
  text "VCC3.3" at 3802,1538 h32 r90
  text "放狼的爷们" at 1431,310 h60
  text "2016-03-11" at 1431,235 h60
  text "GND" at 1010,159 h60
  text "VCC1.8" at 730,79 h60
Bottom Overlay:
  lines w10: 20,2045 820,2045 830,2035 830,360 810,340 23,340 ; 22,340 22,2045
  text "DC-DC" at 190,370 h60

## Text inside footprints (layer, text, board x,y; h text height)
camera: Top Overlay "18" at 3848,2688 h50 r270; Top Overlay "17" at 3748,2688 h50 r270; Top Overlay "1" at 3748,3668 h50 r270; Top Overlay "2" at 3848,3688 h50 r270
ESP8266: Top Overlay "2" at 1760,1040 h50 r180; Top Overlay "1" at 1740,1140 h50 r180; Top Overlay "7" at 1300,1140 h50 r180; Top Overlay "8" at 1300,1040 h50 r180
IO1: Top Overlay "2" at 755,2605 h50; Top Overlay "1" at 675,2745 h50 r180; Top Overlay "7" at 235,2745 h50 r180; Top Overlay "8" at 235,2645 h50 r180
IO2: Top Overlay "2" at 3620,1537 h50 r90; Top Overlay "1" at 3720,1557 h50 r90; Top Overlay "7" at 3720,1997 h50 r90; Top Overlay "8" at 3620,1997 h50 r90
LCD1: Top Overlay "2" at 2295,529 h40 r180; Top Overlay "1" at 2091,207 h40 r180; Top Overlay "33" at 3795,309 h40; Top Overlay "34" at 3795,409 h40
VCC3.3: Top Overlay "6" at 1210,370 h50; Top Overlay "5" at 1210,270 h50; Top Overlay "2" at 850,370 h50; Top Overlay "1" at 870,270 h50
VCC5: Top Overlay "6" at 670,200 h50; Top Overlay "5" at 670,100 h50; Top Overlay "2" at 310,200 h50; Top Overlay "1" at 330,100 h50